# Altium PCB project.PcbDoc
Units mm, origin at the board's own origin, x right, y up, seen from the top; angles counter-clockwise.
Board outline 200.15 x 199.9 mm, 2 copper layers (Top Layer, Bottom Layer); 38 components, 26 nets, 180 pads, 0 vias.
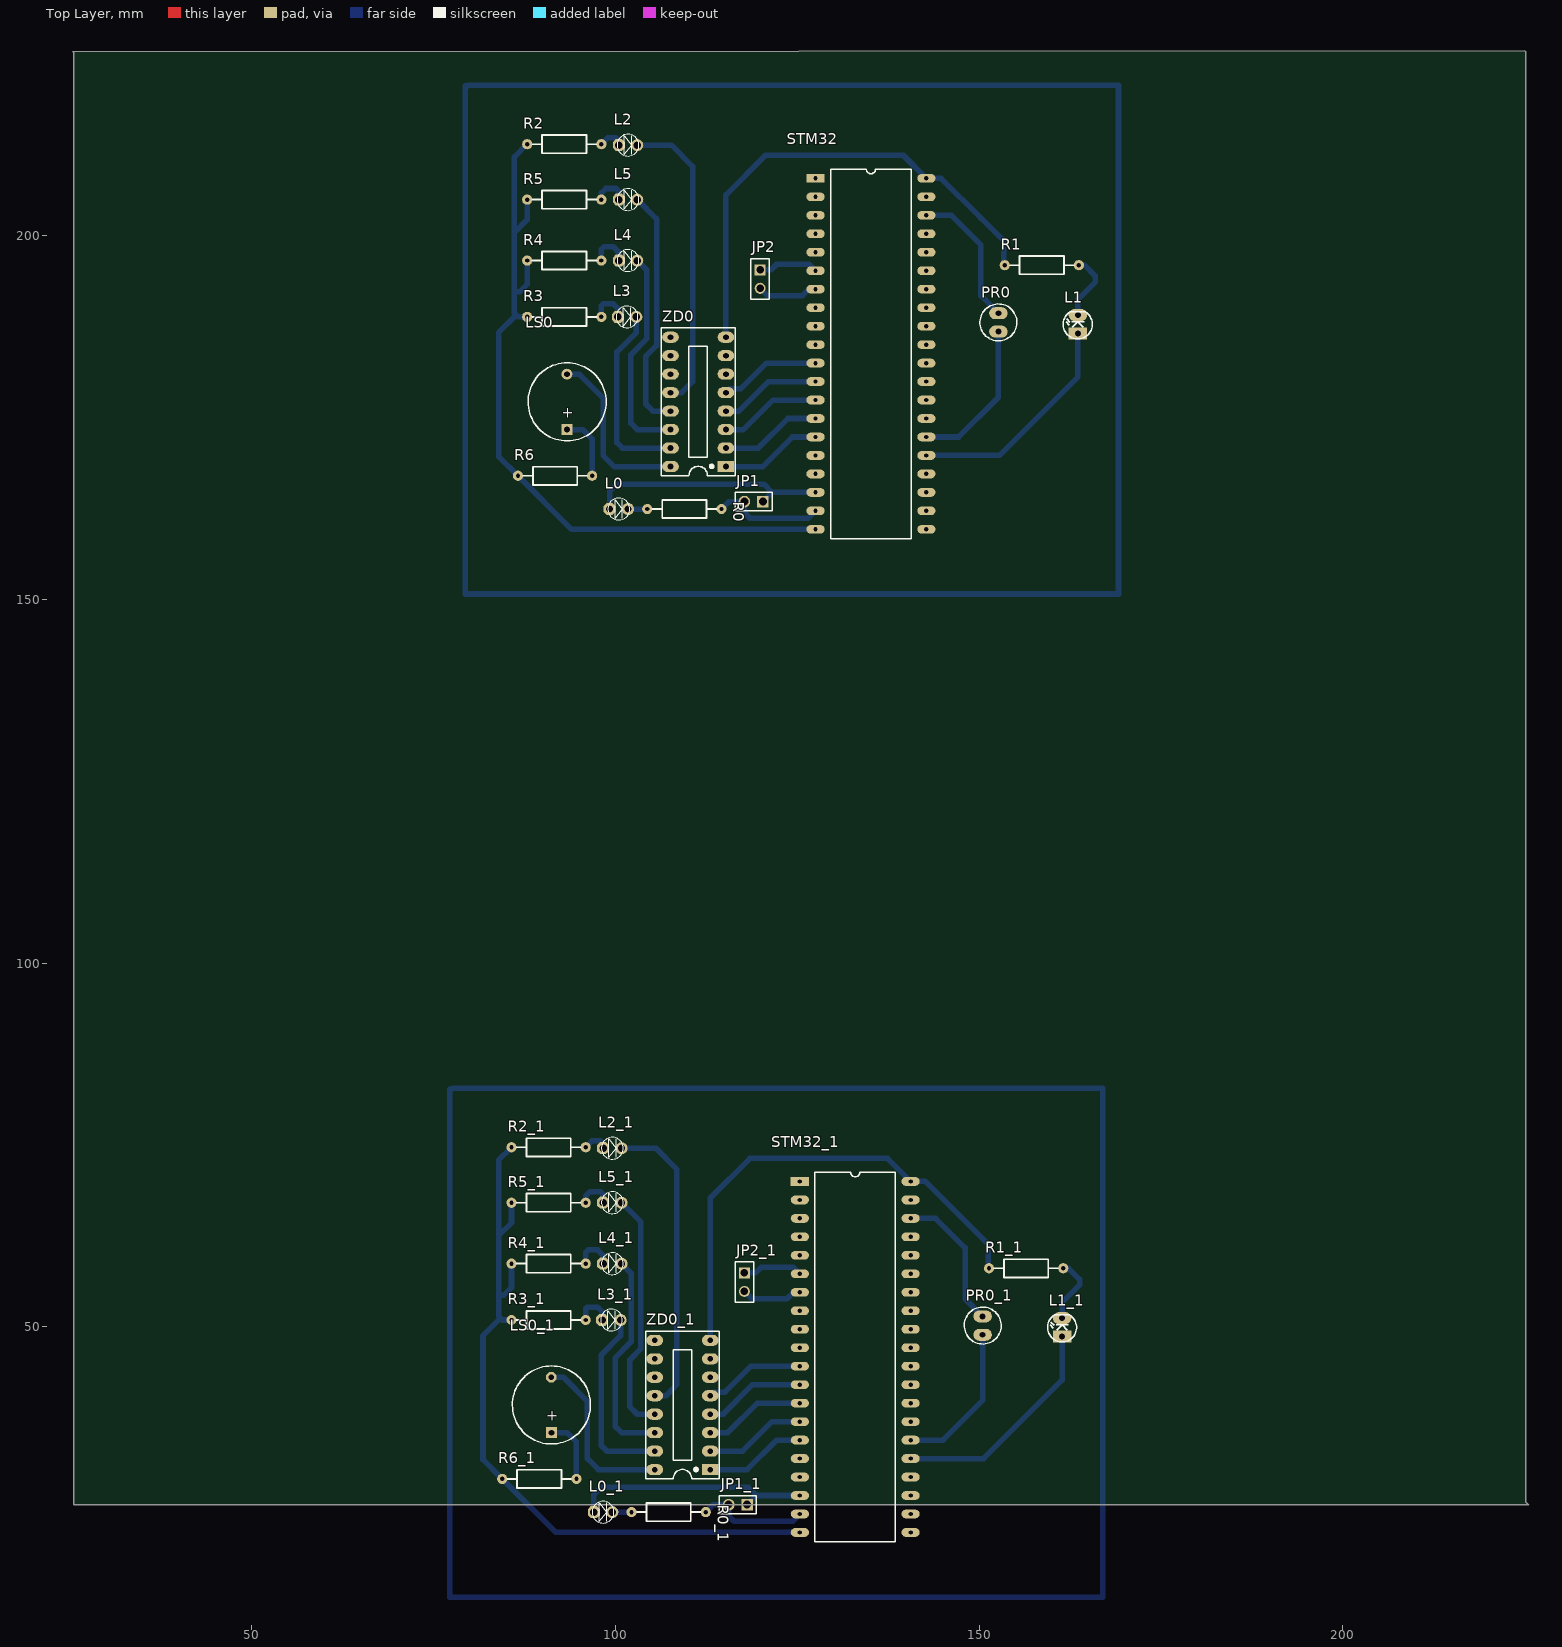
[diagram p0: Top Layer view]
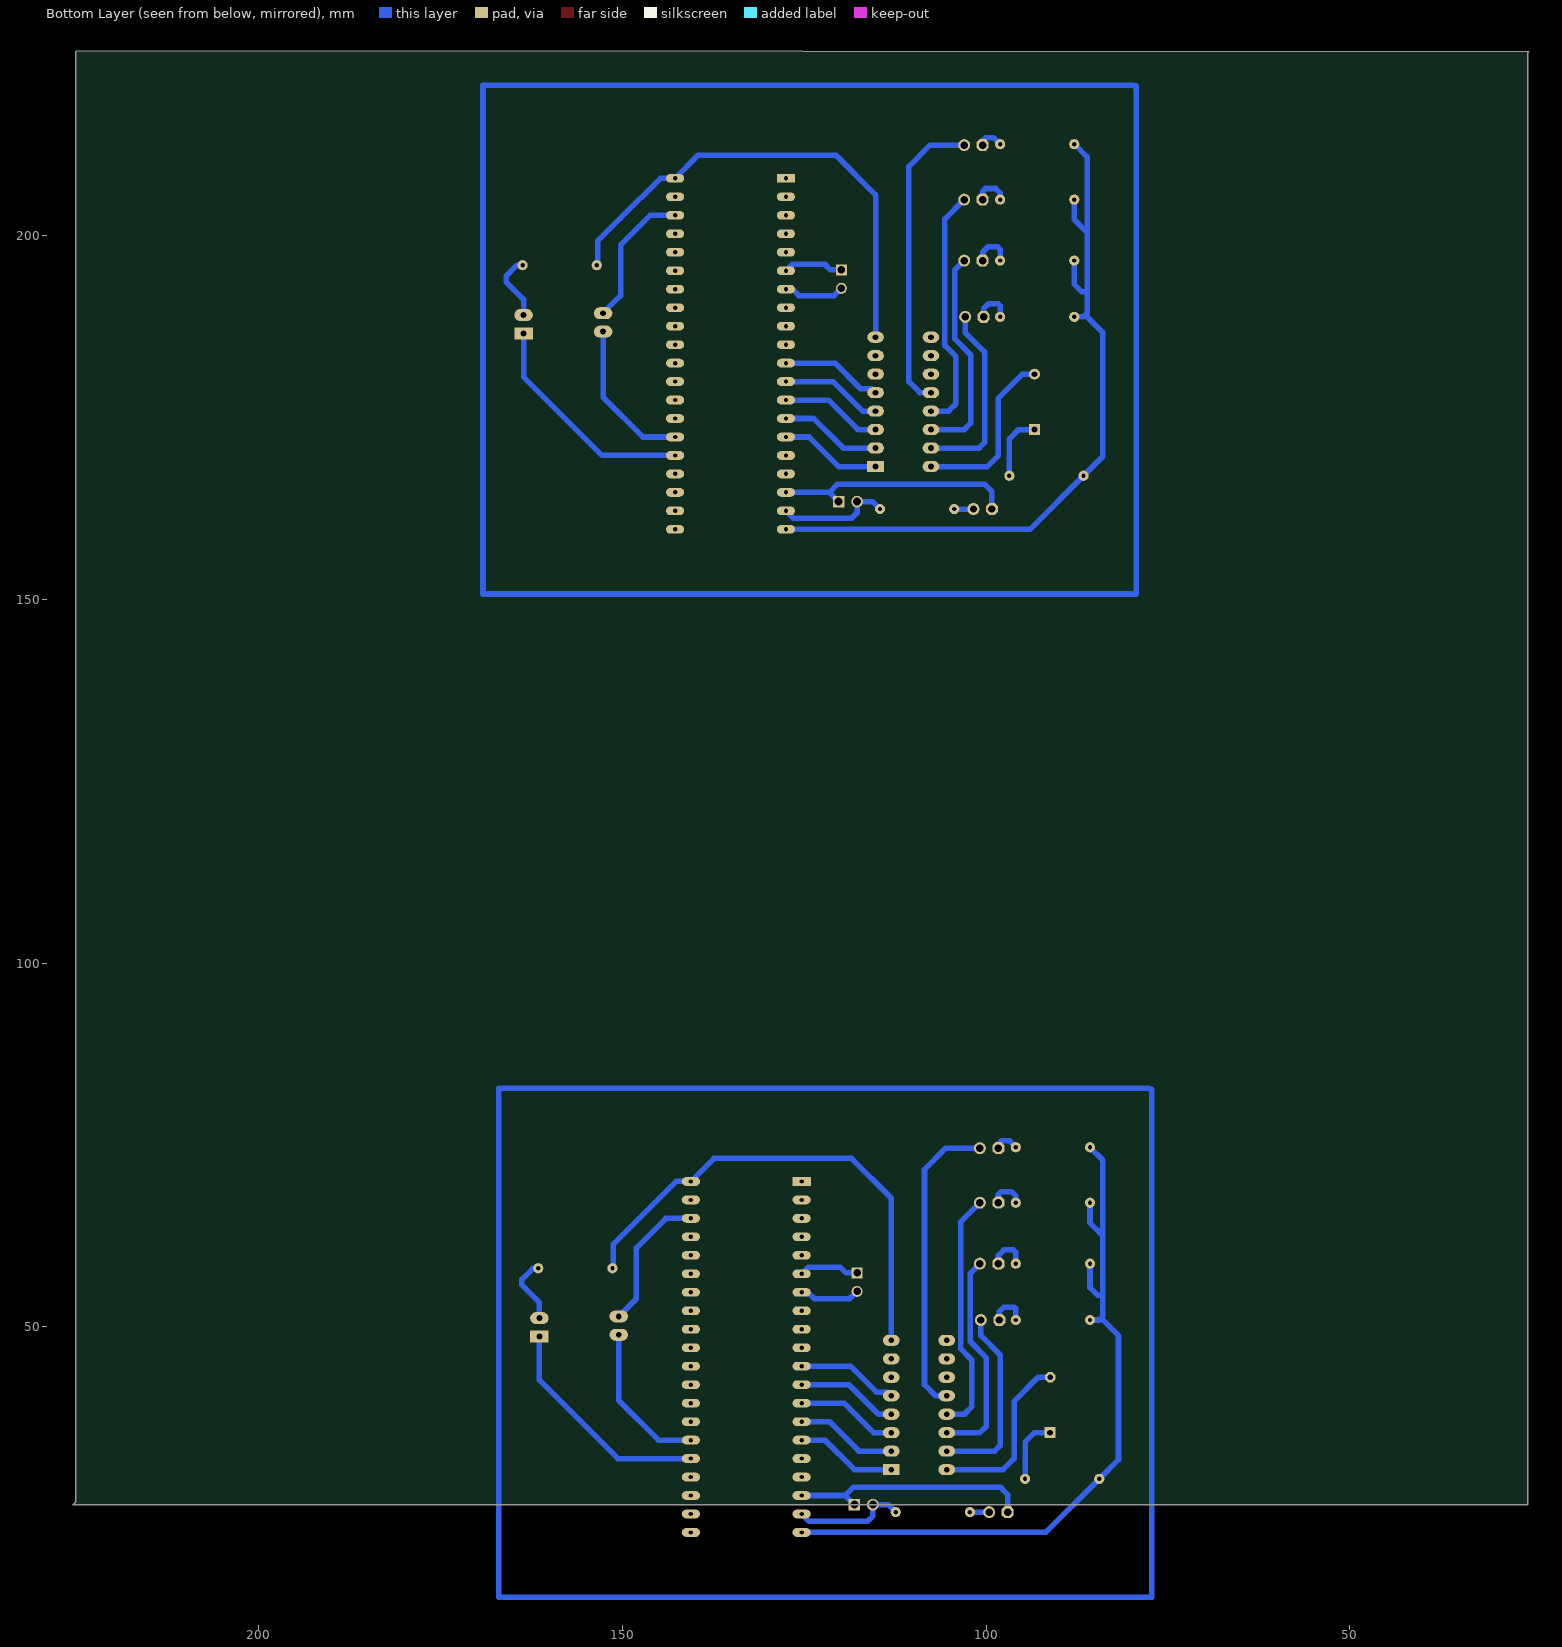
[diagram p1: Bottom Layer view, seen from below]
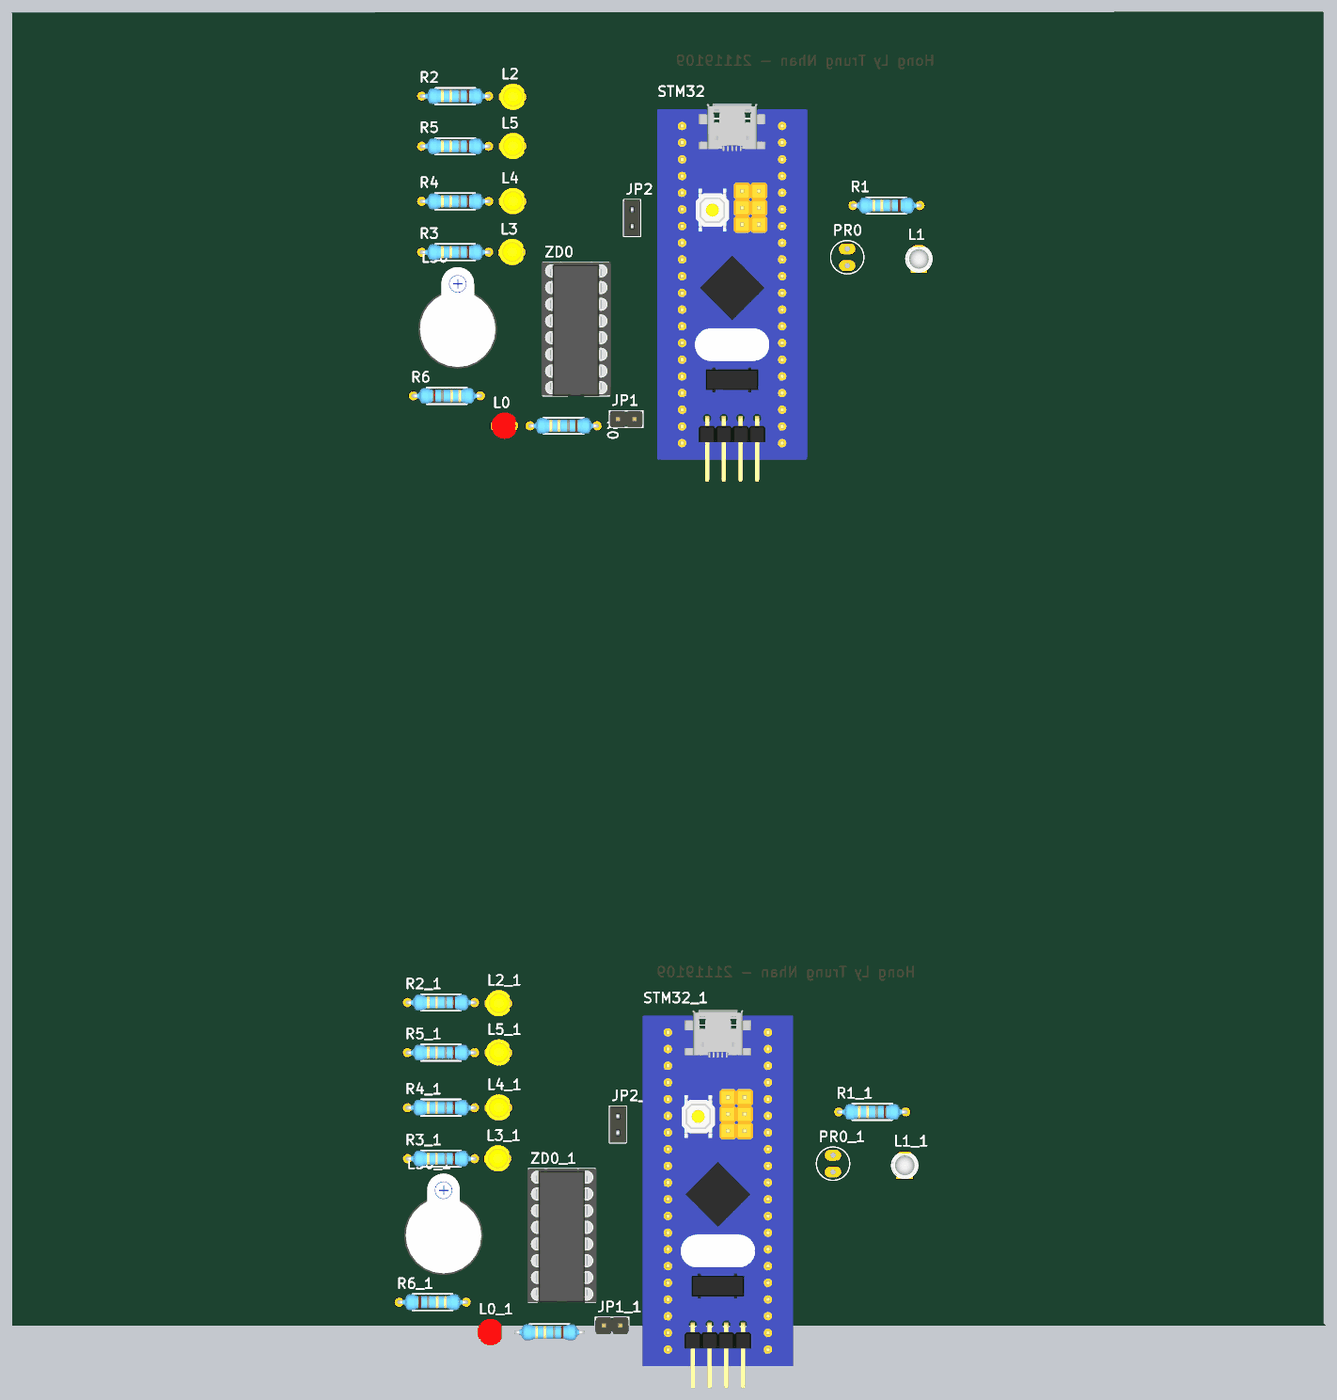
[diagram p2: 3D render of the assembled board from above, using the file's embedded part models]

## Layer stack, top to bottom
Top Solder: solder mask 0.0102, Solder Resist, Dk 3.5
Top Layer: signal copper 0.0356
Dielectric 1: dielectric 0.32, FR-4, Dk 4.8
Bottom Layer: signal copper 0.0356
Bottom Solder: solder mask 0.0102, Solder Resist, Dk 3.5

## Board outline
25.4,225.298 25.527,225.171 25.527,25.527 225.552,25.527 225.171,25.908 225.171,225.298 225.044,225.425

## Design rules (kind name [scope] priority, off if disabled: settings)
Clearance [All] p1: gap=0.254 except(0.762: Arc-Fill Track-Fill SMDPad-Fill THPad-Fill Via-Fill Fill-Fill)
PolygonConnect [All] p1: connectstyle=Relief reliefconductorwidth=0.254 reliefentries=4 polygonreliefangle="90 Angle" airgapwidth=0.254
RoomDefinition Sheet1 [InComponentClass('Sheet1')] p1: confinementstyle=ConfineIn formatcopy=TRUE lockcomponents=FALSE outline 55.118,35.032 144.526,35.032 144.526,111.252 55.118,111.252
RoutingLayers [All] p1: top layer_v5=FALSE bottom layer_v5=TRUE
RoutingVias [All] p1: holewidth=0.711 width=1.27 viastyle="Through Hole" minholewidth=0.711 minwidth=1.27 maxholewidth=0.711 maxwidth=1.27
SolderMaskExpansion [All] p1: expansion=0.102
Width [All] p1: maxlimit=3.81 minlimit=0.711 preferedwidth=0.762
29 further rules are at their usual default settings.

## Classes and differential pairs
component class Sheet1: JP1 JP2 L0 L1 L2 L3 L4 L5 LS0 PR0 R0 R1 R2 R3 R4 R5 R6 STM32 ZD0

## Components (designator, comment, footprint, x,y, rotation, side; value= is the part's Value field where it differs from the comment)
JP1 "JP 1x2 2.54" "JP 1x2 DT" 120.269,163.449 r180 top
JP1_1 "JP 1x2 2.54" "JP 1x2 DT" 118.11,25.527 r180 top (schematic designator JP1)
JP2 "JP 1x2 2.54" "JP 1x2 CT" 119.888,195.326 r270 top
JP2_1 "JP 1x2 2.54" "JP 1x2 CT" 117.729,57.404 r270 top (schematic designator JP2)
L0 "LED 3mm" LED-3MM-RED 99.187,162.433 r0 top
L0_1 "LED 3mm" LED-3MM-RED 97.028,24.511 r0 top (schematic designator L0)
L1 "LED 3mm" LED-3MM-WHITE 163.576,186.563 r90 top
L1_1 "LED 3mm" LED-3MM-WHITE 161.417,48.641 r90 top (schematic designator L1)
L2 "LED 3mm" LED-3MM-YELLOW 100.457,212.471 r0 top
L2_1 "LED 3mm" LED-3MM-YELLOW 98.298,74.549 r0 top (schematic designator L2)
L3 "LED 3mm" LED-3MM-YELLOW 100.33,188.849 r0 top
L3_1 "LED 3mm" LED-3MM-YELLOW 98.171,50.927 r0 top (schematic designator L3)
L4 "LED 3mm" LED-3MM-YELLOW 100.457,196.596 r0 top
L4_1 "LED 3mm" LED-3MM-YELLOW 98.298,58.674 r0 top (schematic designator L4)
L5 "LED 3mm" LED-3MM-YELLOW 100.457,204.978 r0 top
L5_1 "LED 3mm" LED-3MM-YELLOW 98.298,67.056 r0 top (schematic designator L5)
LS0 "Coi Chip Speaker" "Coi Chip Speacker" 93.345,173.355 r90 top
LS0_1 "Coi Chip Speaker" "Coi Chip Speacker" 91.186,35.433 r90 top (schematic designator LS0)
PR0 "Quang Tro" "Quang Tro" 152.654,189.357 r270 top
PR0_1 "Quang Tro" "Quang Tro" 150.495,51.435 r270 top (schematic designator PR0)
R0 "10k" "tro vach 1/4w" 109.474,162.433 r0 top
R0_1 "10k" "tro vach 1/4w" 107.315,24.511 r0 top (schematic designator R0)
R1 "330R" "tro vach 1/4w" 158.623,195.961 r0 top
R1_1 "330R" "tro vach 1/4w" 156.464,58.039 r0 top (schematic designator R1)
R2 "330R" "tro vach 1/4w" 92.964,212.598 r0 top
R2_1 "330R" "tro vach 1/4w" 90.805,74.676 r0 top (schematic designator R2)
R3 "330R" "tro vach 1/4w" 92.964,188.849 r0 top
R3_1 "330R" "tro vach 1/4w" 90.805,50.927 r0 top (schematic designator R3)
R4 "330R" "tro vach 1/4w" 92.964,196.596 r0 top
R4_1 "330R" "tro vach 1/4w" 90.805,58.674 r0 top (schematic designator R4)
R5 "330R" "tro vach 1/4w" 92.964,204.978 r0 top
R5_1 "330R" "tro vach 1/4w" 90.805,67.056 r0 top (schematic designator R5)
R6 "330R" "tro vach 1/4w" 91.694,167.005 r180 top
R6_1 "330R" "tro vach 1/4w" 89.535,29.083 r180 top (schematic designator R6)
STM32 "KIT STM32F103C8T6" "STM32F103 KIT" 127.508,207.899 r0 top
STM32_1 "KIT STM32F103C8T6" "STM32F103 KIT" 125.349,69.977 r0 top (schematic designator STM32)
ZD0 "DIP16" DIP16/W0.3 115.189,168.275 r90 top
ZD0_1 "DIP16" DIP16/W0.3 113.03,30.353 r90 top (schematic designator ZD0)

## Footprints (in the part's own frame and the unit in brackets; to place one, negate y for a bottom-side part, rotate by r counter-clockwise, add the part's x,y. Pads: shape width x height; smd on the part's side, far side on the other; paste and mask are expansions set on the pad)
"Coi Chip Speacker" [mm]
  rect 1.5x1.5 hole 0.8: 1(0,0)
  round 1.5 hole 0.8: 2(7.62,0.013)
  silkscreen extent -1.55,-5.38 9.18,5.36, body extent -2.22,-6 13.24,6, height 4.5
DIP16/W0.3 [mil] "16 PIN, W 300mil, Pin to pin 100mil"
  rect 60x90 hole 31: 1(0,0)
  oval 60x90 hole 31: 2(100,0) 3(200,0) 4(300,0) 5(400,0) 6(500,0) 7(600,0) 8(700,0) 9(700,300) 10(600,300) 11(500,300) 12(400,300) 13(300,300) 14(200,300) 15(100,300) 16(0,300)
  silkscreen extent -50,-50 750,350, body extent -52,-57 752,356, height 299
"JP 1x2 CT" [mm] "JP 1x2 CT"
  rect 1.52x1.52 hole 1.02: 1(0,0)
  round 1.52 hole 1.02: 2(2.54,0)
  silkscreen extent -1.52,-1.27 4.06,1.27, body extent -1.52,-1.25 4.06,1.25, height 8.51
"JP 1x2 DT" [mm] "2 pins, 1 row, straight, gold plating"
  rect 1.6x1.6 hole 1.1: 1(0,0)
  round 1.6 hole 1.1: 2(2.54,0)
  silkscreen extent -1.27,-1.27 3.81,1.27, body extent -1.27,-1.27 3.81,1.27, height 8.54
LED-3MM-RED [mil]
  oct 65x65 hole 40: 1(0,0)
  round 65 hole 40: 2(100,0)
  silkscreen extent -9,-59 109,59, body extent -27,-77 117,80, height 181
LED-3MM-WHITE [mil] "LED 2 PIN, 3ly Only colour"
  rect 65x100 hole 32: 1(0,0)
  oval 65x100 hole 32: 2(100,0)
  silkscreen extent -29,-78 118,79, body extent -25,-75 113,75, height 217
LED-3MM-YELLOW [mil]
  oct 65x65 hole 40: 1(0,0)
  round 65 hole 40: 2(100,0)
  silkscreen extent -9,-59 109,59, body extent -27,-77 117,80, height 181
"Quang Tro" [mil] "QUANG TRO"
  oval 65x100 hole 32: 1(0,0) 2(100,0)
  silkscreen extent -50,-100 150,100
"STM32F103 KIT" [mm]
  rect 2.5x1.2 hole 0.6: 1(0,0)
  oval 2.5x1.2 hole 0.6: 2(0,-2.54) 3(0,-5.08) 4(0,-7.62) 5(0,-10.16) 6(0,-12.7) 7(0,-15.24) 8(0,-17.78) 9(0,-20.32) 10(0,-22.86) 11(0,-25.4) 12(0,-27.94) 13(0,-30.48) 14(0,-33.02) 15(0,-35.56) 16(0,-38.1) 17(0,-40.64) 18(0,-43.18) 19(0,-45.72) 20(0,-48.26) 21(15.24,-48.26) 22(15.24,-45.72) 23(15.24,-43.18) 24(15.24,-40.64) 25(15.24,-38.1) 26(15.24,-35.56) 27(15.24,-33.02) 28(15.24,-30.48) 29(15.24,-27.94) 30(15.24,-25.4) 31(15.24,-22.86) 32(15.24,-20.32) 33(15.24,-17.78) 34(15.24,-15.24) 35(15.24,-12.7) 36(15.24,-10.16) 37(15.24,-7.62) 38(15.24,-5.08) 39(15.24,-2.54) 40(15.24,0)
  silkscreen extent 2.08,-49.53 13.16,1.27, body extent -3.81,-53.97 19.05,3.59, height 16.12
"tro vach 1/4w" [mm]
  round 1.4 hole 0.6: 1(-5.1,0) 2(5.1,0)
  silkscreen extent -4.39,-1.25 4.42,1.25, body extent -5.38,-1.2 5.38,1.2, height 2.41

## Part data
JP1 JP1_1: library part "JP 1x2 2.54 Duc Thang", "C?m"
JP2 JP2_1: library part "JP 1x2 2.54 Cai Thang", "C?m"
L0 L0_1: library part "LED 3mm Do", "C?m"
L1 L1_1: library part "LED 3mm Trang", "C?m"
L2 L2_1 L3 L3_1 L4 L4_1 L5 L5_1: library part "LED 3mm Vang", "C?m"
LS0 LS0_1: "Còi chip"
PR0 PR0_1: "Photoresistor"
R0 R0_1: library part "Tro Vach 1/4W 5% 10k", "Cam"
R1 R1_1 R2 R2_1 R3 R3_1 R4 R4_1 R5 R5_1 R6 R6_1: library part "Tro Vach 1/4W 5% 330R", "C?m"
STM32 STM32_1: library part "STM32f103 Bluepill", "KIT STM32F103C8T6 Bluepill"

## Nets (pads, with @x,y where several pads share a name; then routed paths per layer and width w, separated by ;. In a path a pad name is that pad's centre, name@x,y a point inside that pad or via, vN(x,y) a via of type N, cw(c..) or ccw(c..) an arc to the next point about the centre after c; other vN are vias at no path point)
ADC: PR0.2 STM32.26 | length 21.2
  Bottom Layer w0.762: STM32.26 147.193,172.339 152.654,177.8 PR0.2
BUZZ: STM32.15 ZD0.1 | length 14
  Bottom Layer w0.762: ZD0.1 120.269,168.275 124.333,172.339 STM32.15
GND: R1.1 STM32.40 ZD0.8 | length 68.2
  Bottom Layer w0.762: ZD0.8 115.189,205.613 120.65,211.074 139.573,211.074 STM32.40 144.78,207.899 150.241,202.438 153.396,199.283 R1.1@153.396,195.961
LED: L1.1 STM32.25 | length 31.3
  Bottom Layer w0.762: STM32.25 152.781,169.799 163.576,180.594 L1.1
LED1: STM32.14 ZD0.2 | length 14
  Bottom Layer w0.762: ZD0.2 119.634,170.815 123.698,174.879 STM32.14
LED2: STM32.13 ZD0.3 | length 14
  Bottom Layer w0.762: ZD0.3 117.602,173.355 121.666,177.419 STM32.13
LED3: STM32.12 ZD0.4 | length 14
  Bottom Layer w0.762: ZD0.4 116.967,175.895 121.031,179.959 STM32.12
LED4: STM32.11 ZD0.5 | length 14
  Bottom Layer w0.762: ZD0.5 115.697,178.943 117.221,178.943 120.777,182.499 STM32.11
NetL0_2: L0.2 R0.1 | length 2.6
  Bottom Layer w0.762: L0.2 R0.1
NetL1_2: L1.2 R1.2 | length 9.4
  Bottom Layer w0.762: L1.2 163.576,191.262 165.989,193.675 165.989,194.437 164.465,195.961 R1.2@163.596,195.961
NetL2_1: L2.1 R2.2 | length 3.5
  Bottom Layer w0.762: R2.2 98.933,213.467 100.056,213.467 100.457,213.066 L2.1
NetL3_1: L3.1 R3.2 | length 5.3
  Bottom Layer w0.762: R3.2 98.064,190.393 98.298,190.627 99.695,190.627 100.33,189.992 L3.1
NetL4_1: L4.1 R4.2 | length 5.5
  Bottom Layer w0.762: R4.2 98.064,198.14 98.425,198.501 99.695,198.501 100.457,197.739 L4.1
NetL5_1: L5.1 R5.2 | length 4.9
  Bottom Layer w0.762: R5.2 98.064,205.887 98.679,206.502 100.076,206.502 100.457,206.121 L5.1
NetLS0_1: LS0.1 R6.1 | length 9
  Bottom Layer w0.762: LS0.1 95.504,173.355 96.794,172.065 R6.1
OUT1: LS0.2 ZD0.16 | length 24.1
  Bottom Layer w0.762: LS0.2 94.996,180.975 98.298,177.673 98.298,169.799 99.822,168.275 ZD0.16
OUT2: L3.2 ZD0.15 | length 26.1
  Bottom Layer w0.762: L3.2 102.87,186.69 100.203,184.023 100.203,171.577 100.965,170.815 ZD0.15
OUT3: L4.2 ZD0.14 | length 29.7
  Bottom Layer w0.762: L4.2 104.331,195.262 104.331,185.864 102.108,183.642 102.108,174.244 102.997,173.355 ZD0.14
OUT4: L5.2 ZD0.13 | length 33.7
  Bottom Layer w0.762: L5.2 105.664,202.311 105.664,184.912 104.14,183.388 104.14,176.911 105.156,175.895 ZD0.13
OUT5: L2.2 ZD0.12 | length 42.1
  Bottom Layer w0.762: L2.2 107.696,212.471 110.617,209.55 110.617,179.959 109.093,178.435 ZD0.12
RX: JP2.2 STM32.7 | length 8.4
  Bottom Layer w0.762: JP2.2 120.904,191.77 125.73,191.77 126.619,192.659 STM32.7
TX: JP2.1 STM32.6 | length 8.3
  Bottom Layer w0.762: JP2.1 121.412,195.326 122.174,196.088 126.619,196.088 STM32.6
VDD: PR0.1 STM32.38 | length 19.6
  Bottom Layer w0.762: STM32.38 146.177,202.819 150.241,198.755 150.241,191.77 PR0.1
VIN: JP1.1 L0.1 STM32.18 | length 33.4
  Bottom Layer w0.762: L0.1 99.187,164.846 100.203,165.862 120.396,165.862 121.539,164.719 ; JP1.1 121.539,164.719 ; STM32.18 121.539,164.719
VPOWER: R2.1 R3.1 R4.1 R5.1 R6.2 STM32.20 | length 104.8
  Bottom Layer w0.762: R3.1 86.614,188.849 86.36,189.103 ; R4.1 87.864,193.314 86.828,192.278 86.106,192.278 ; R5.1 87.864,202.204 86.106,200.446 ; R2.1 86.106,210.84 86.106,200.446 ; STM32.20 93.96,159.639 R6.2 83.947,169.652 83.947,186.69 86.36,189.103 ; 86.106,192.278 86.106,189.357 86.36,189.103 ; 86.106,192.278 86.106,200.446
VSS: JP1.2 R0.2 STM32.19 | length 15.6
  Bottom Layer w0.762: R0.2 115.59,163.449 JP1.2 117.729,161.925 118.491,161.163 126.492,161.163 STM32.19
pads on no net: JP1_1.1 JP1_1.2 JP2_1.1 JP2_1.2 L0_1.1 L0_1.2 L1_1.1 L1_1.2 L2_1.1 L2_1.2 L3_1.1 L3_1.2 L4_1.1 L4_1.2 L5_1.1 L5_1.2 LS0_1.1 LS0_1.2 PR0_1.1 PR0_1.2 R0_1.1 R0_1.2 R1_1.1 R1_1.2 R2_1.1 R2_1.2 R3_1.1 R3_1.2 R4_1.1 R4_1.2 R5_1.1 R5_1.2 R6_1.1 R6_1.2 STM32.1 STM32.2 STM32.3 STM32.4 STM32.5 STM32.8 STM32.9 STM32.10 STM32.16 STM32.17 STM32.21 STM32.22 STM32.23 STM32.24 STM32.27 STM32.28 STM32.29 STM32.30 STM32.31 STM32.32 STM32.33 STM32.34 STM32.35 STM32.36 STM32.37 STM32.39 STM32_1.1 STM32_1.2 STM32_1.3 STM32_1.4 STM32_1.5 STM32_1.6 STM32_1.7 STM32_1.8 STM32_1.9 STM32_1.10 STM32_1.11 STM32_1.12 STM32_1.13 STM32_1.14 STM32_1.15 STM32_1.16 STM32_1.17 STM32_1.18 STM32_1.19 STM32_1.20 STM32_1.21 STM32_1.22 STM32_1.23 STM32_1.24 STM32_1.25 STM32_1.26 STM32_1.27 STM32_1.28 STM32_1.29 STM32_1.30 STM32_1.31 STM32_1.32 STM32_1.33 STM32_1.34 STM32_1.35 STM32_1.36 STM32_1.37 STM32_1.38 STM32_1.39 STM32_1.40 ZD0.6 ZD0.7 ZD0.9 ZD0.10 ZD0.11 ZD0_1.1 ZD0_1.2 ZD0_1.3 ZD0_1.4 ZD0_1.5 ZD0_1.6 ZD0_1.7 ZD0_1.8 ZD0_1.9 ZD0_1.10 ZD0_1.11 ZD0_1.12 ZD0_1.13 ZD0_1.14 ZD0_1.15 ZD0_1.16
copper on no net: | length 1215.8
  Bottom Layer w0.762: 77.216,82.423 77.597,82.804 167.005,82.804 167.005,12.827 77.216,12.827 77.216,82.677 ; 79.375,220.345 79.756,220.726 169.164,220.726 169.164,150.749 79.375,150.749 79.375,220.599 ; 85.705,50.927 84.455,50.927 84.201,51.181 ; 85.705,58.674 85.705,55.392 84.669,54.356 83.947,54.356 ; 85.705,67.056 85.705,64.282 83.947,62.524 ; 85.705,74.676 83.947,72.918 83.947,62.524 ; 91.173,43.053 92.837,43.053 96.139,39.751 96.139,31.877 97.663,30.353 105.41,30.353 ; 91.186,35.433 93.345,35.433 94.635,34.143 94.635,29.083 ; 95.905,50.927 95.905,52.471 96.139,52.705 97.536,52.705 98.171,52.07 98.171,50.927 ; 95.905,58.674 95.905,60.218 96.266,60.579 97.536,60.579 98.298,59.817 98.298,58.674 ; 95.905,67.056 95.905,67.965 96.52,68.58 97.917,68.58 98.298,68.199 98.298,67.056 ; 95.905,74.676 96.774,75.545 97.897,75.545 98.298,75.144 98.298,74.549 ; 97.028,24.511 97.028,26.924 98.044,27.94 118.237,27.94 119.38,26.797 ; 99.568,24.511 102.215,24.511 ; 100.711,50.927 100.711,48.768 98.044,46.101 98.044,33.655 98.806,32.893 105.41,32.893 ; 100.838,58.674 102.171,57.34 102.171,47.942 99.949,45.72 99.949,36.322 100.838,35.433 105.41,35.433 ; 100.838,67.056 103.505,64.389 103.505,46.99 101.981,45.466 101.981,38.989 102.997,37.973 105.41,37.973 ; 100.838,74.549 105.537,74.549 108.458,71.628 108.458,42.037 106.934,40.513 105.41,40.513 ; 112.415,24.511 113.431,25.527 115.57,25.527 115.57,24.003 116.332,23.241 124.333,23.241 125.349,24.257 ; 113.03,30.353 118.11,30.353 122.174,34.417 125.349,34.417 ; 113.03,32.893 117.475,32.893 121.539,36.957 125.349,36.957 ; 113.03,35.433 115.443,35.433 119.507,39.497 125.349,39.497 ; 113.03,37.973 114.808,37.973 118.872,42.037 125.349,42.037 ; 113.03,40.513 113.538,41.021 115.062,41.021 118.618,44.577 125.349,44.577 ; 113.03,48.133 113.03,67.691 118.491,73.152 137.414,73.152 140.589,69.977 142.621,69.977 148.082,64.516 151.237,61.361 151.237,58.039 ; 117.729,54.864 118.745,53.848 123.571,53.848 124.46,54.737 125.349,54.737 ; 117.729,57.404 119.253,57.404 120.015,58.166 124.46,58.166 125.349,57.277 ; 118.11,25.527 119.38,26.797 ; 125.349,21.717 91.801,21.717 84.435,29.083 81.788,31.73 81.788,48.768 84.201,51.181 ; 125.349,26.797 119.38,26.797 ; 140.589,31.877 150.622,31.877 161.417,42.672 161.417,48.641 ; 140.589,34.417 145.034,34.417 150.495,39.878 150.495,48.895 ; 140.589,64.897 144.018,64.897 148.082,60.833 148.082,53.848 150.495,51.435 ; 161.417,51.181 161.417,53.34 163.83,55.753 163.83,56.515 162.306,58.039 161.437,58.039 ; 83.947,54.356 83.947,62.524 ; 83.947,54.356 83.947,51.435 84.201,51.181

## Other copper
Multi-Layer:
  text "Hong Ly Trung Nhan - 21119109" at 166.116,217.297 h1.52
  text "Hong Ly Trung Nhan - 21119109" at 163.195,78.613 h1.52

## Text inside footprints (layer, text, board x,y; h text height)
LS0: Top Overlay "+" at 94.056,174.765 h1.52 r90
LS0_1: Top Overlay "+" at 91.897,36.843 h1.52 r90